# Altium PCB Anemometer.PcbDoc
Units mm, origin at the board's own origin, x right, y up, seen from the top; angles counter-clockwise.
Board outline 100 x 100 mm, 2 copper layers (Top Layer, Bottom Layer); 27 components, 35 nets, 139 pads, 7 vias.
Unrouted connection lines stored in the file: 51.
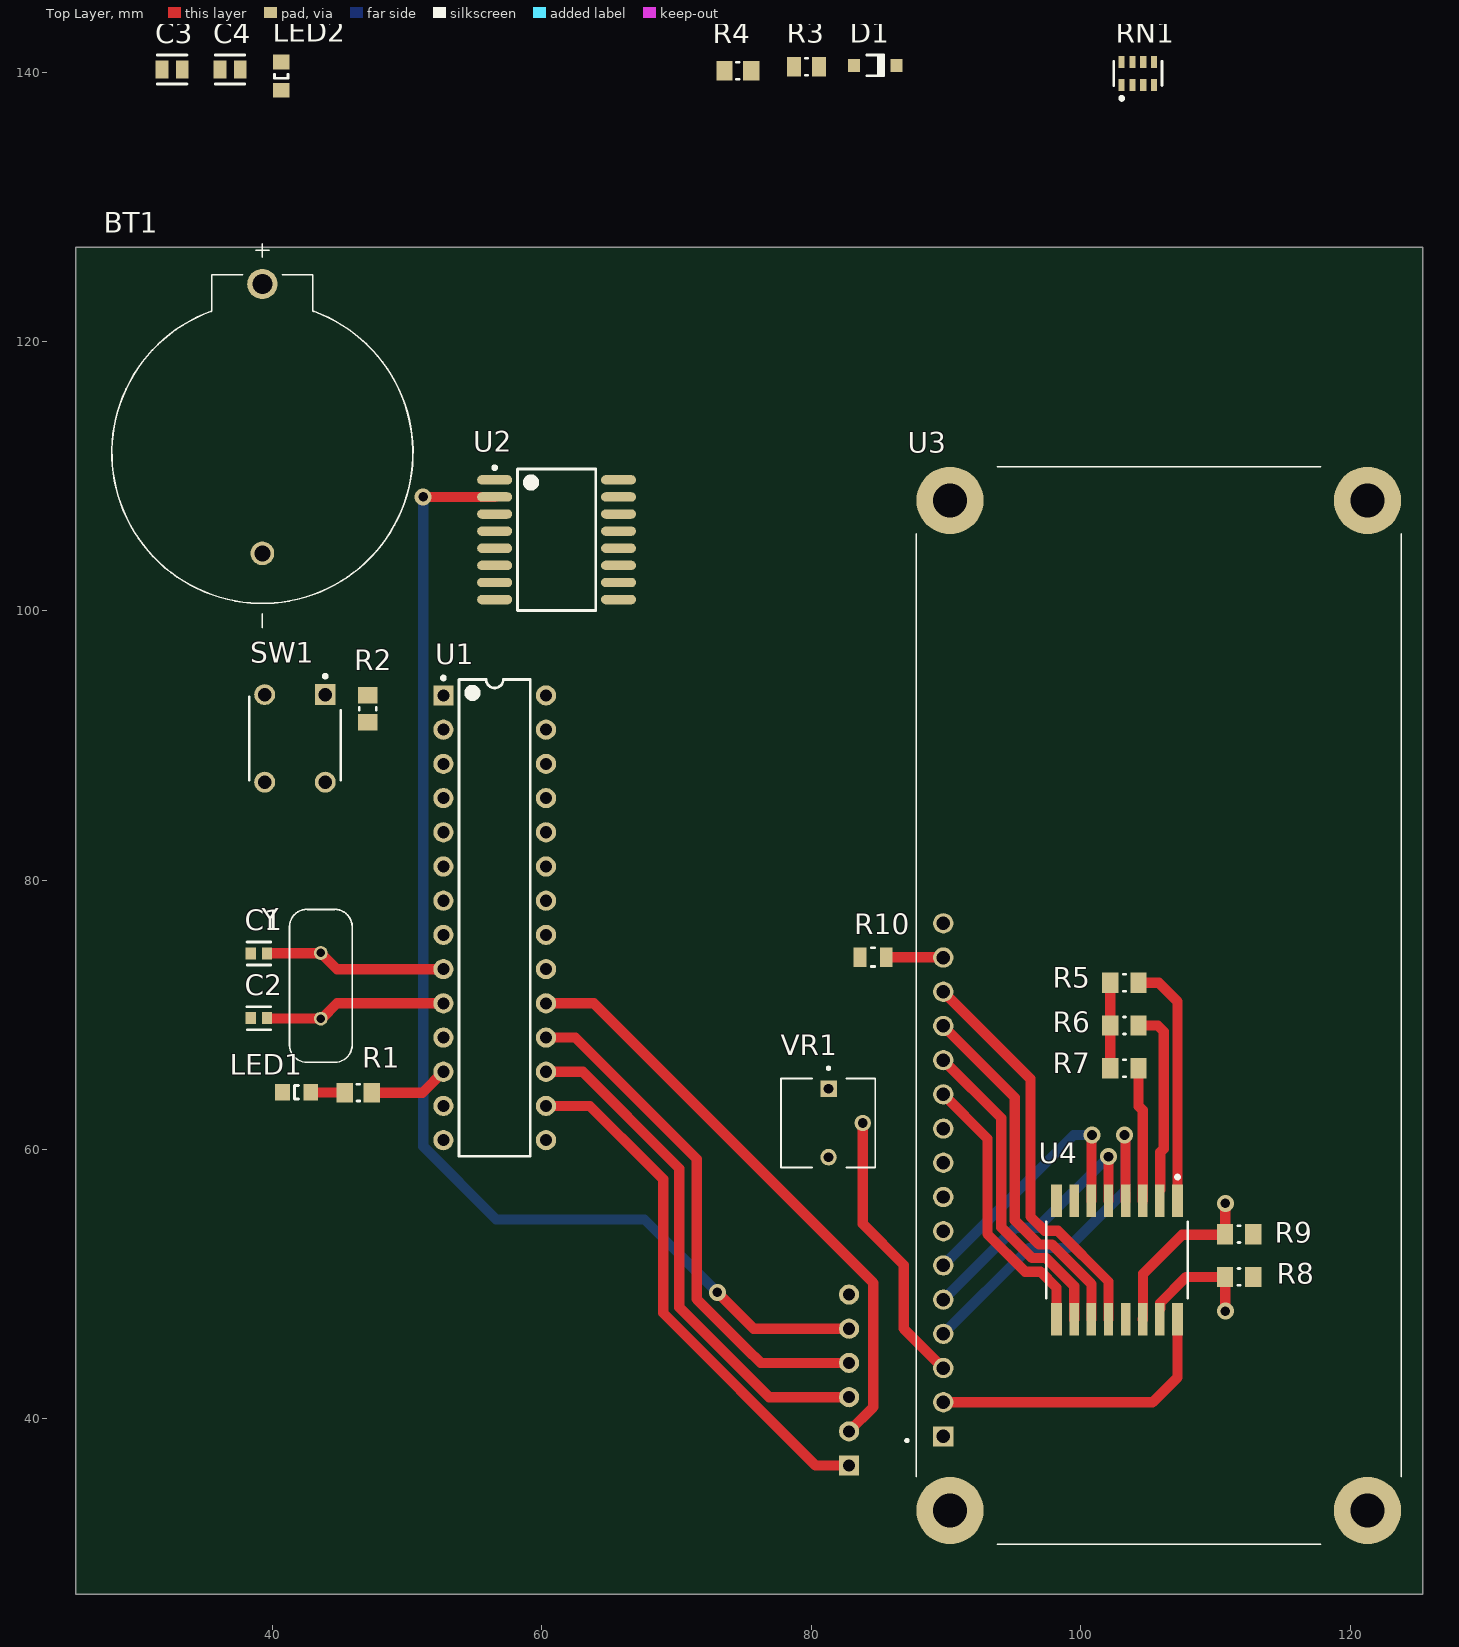
[diagram p0: Top Layer view]
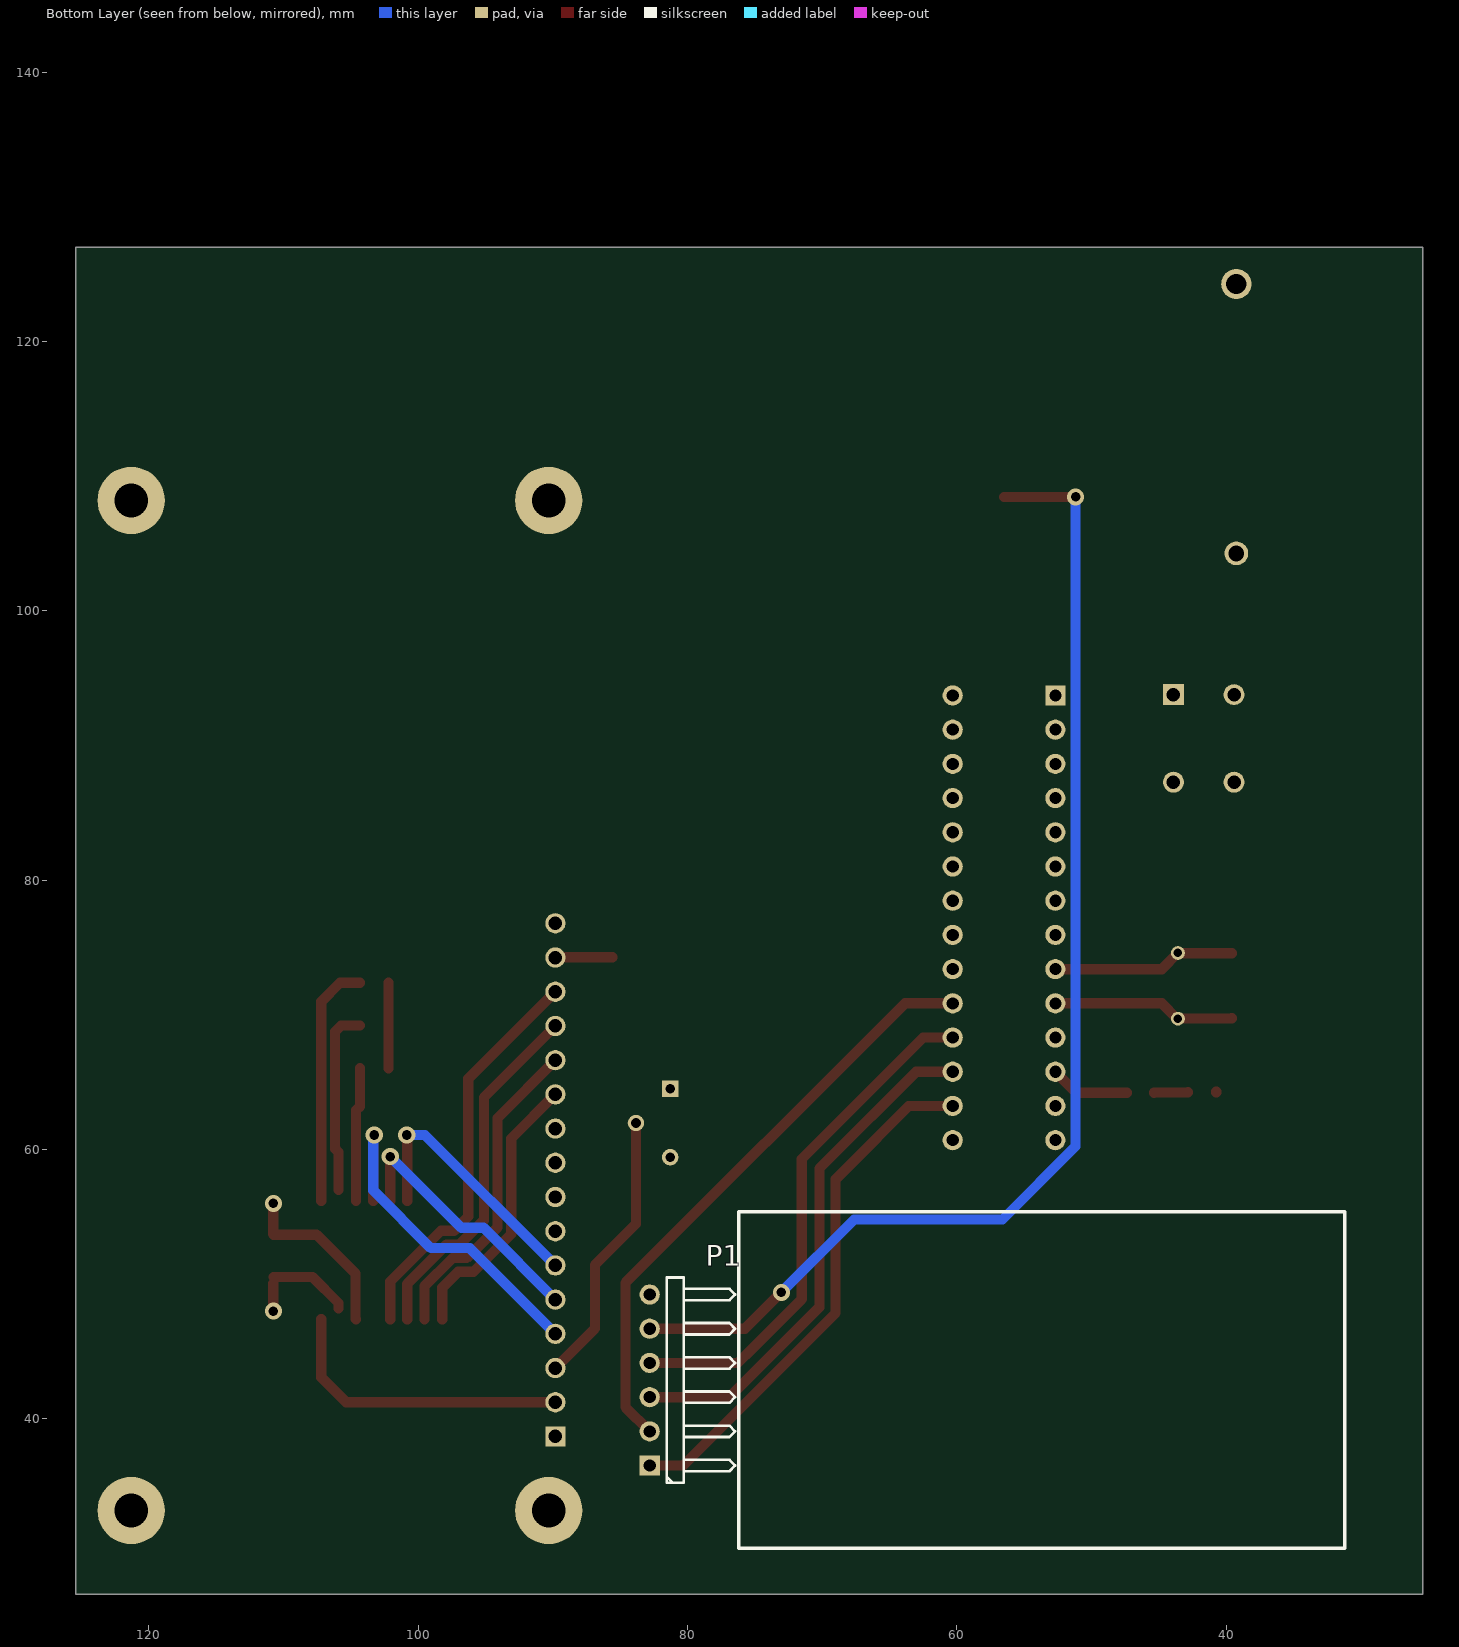
[diagram p1: Bottom Layer view, seen from below]

## Layer stack, top to bottom
Top Solder: solder mask 0.0102, Solder Resist, Dk 3.5
Top Layer: signal copper 0.0356
Dielectric 1: dielectric 0.32, FR-4, Dk 4.8
Bottom Layer: signal copper 0.0356
Bottom Solder: solder mask 0.0102, Solder Resist, Dk 3.5

## Board outline
25.4,27 125.4,27 125.4,127 25.4,127

## Design rules (kind name [scope] priority, off if disabled: settings)
Clearance [All] p1: gap=0.254 ignorepadtopadclearanceinfootprint=FALSE except(0: Arc-Hole Track-Hole SMDPad-Hole THPad-Hole Via-Hole Fill-Hole Poly-Hole Region-Hole Text-Hole)
ComponentClearance Under_LCD [InComponent('U3') vs InComponent('U4','R7','R5','R6','R8','R9')] p1: gap=0 collisioncheckmode=3 verticalgap=0 showdistances=FALSE
ComponentClearance ComponentClearance_1 [All] p2: gap=0.254 collisioncheckmode=3 verticalgap=0.254 showdistances=FALSE
MatchedLengths SPI_BUS [InNetClass('SPI_BUS')] p1: tolerance=0.254 checknetsindiffpair=FALSE checkdiffpairvsdiffpair=TRUE checkxsignals=TRUE checkothers=TRUE
PolygonConnect [All] p1: connectstyle=Relief reliefconductorwidth=0.254 reliefentries=4 polygonreliefangle="90 Angle" airgapwidth=0.254
RoomDefinition SD_Storage_ct [InComponentClass('SD_Storage_ct')] p1: confinementstyle=ConfineIn formatcopy=TRUE lockcomponents=FALSE outline 30,29.7 84.3,29.7 84.3,56.4 30,56.4
RoomDefinition Processing [InComponentClass('Processing')] p2: confinementstyle=ConfineIn formatcopy=TRUE lockcomponents=FALSE outline 27.49,58.85 64.69,58.85 64.69,97.65 27.49,97.65
RoomDefinition RTC [InComponentClass('RTC')] p3: confinementstyle=ConfineIn formatcopy=TRUE lockcomponents=FALSE outline 31.2,115.045 106.9,115.045 106.9,146.545 31.2,146.545
RoomDefinition LCD [InComponentClass('LCD')] p4: confinementstyle=ConfineIn formatcopy=TRUE lockcomponents=FALSE outline 86.233,27.82 126.746,27.82 126.746,111.32 86.233,111.32
RoutingVias [All] p1: holewidth=0.711 width=1.27 viastyle="Through Hole" minholewidth=0.711 minwidth=1.27 maxholewidth=0.711 maxwidth=1.27
SolderMaskExpansion [All] p1: expansion=0.102 istentingtop=FALSE
Width [All] p1: maxlimit=0.762 minlimit=0.254 preferedwidth=0.508 minimp=50.000000 maximp=50.000000 favimp=50.000000
29 further rules are at their usual default settings.

## Classes and differential pairs
net class SPI_BUS: MISO MOSI SDCS SDSCK
component class SD_Storage_ct: P1
component class RTC: BT1 C3 C4 D1 LED2 R3 R4 RN1 U2
component class Processing: C1 C2 LED1 R1 R2 SW1 U1 Y
component class LCD: R5 R6 R7 R8 R9 R10 U3 U4 VR1

## Components (designator, comment, footprint, x,y, rotation, side; value= is the part's Value field where it differs from the comment)
BT1 "BS-7" BAT_BS-7 39.243,114.267 r90 top
C1 "C0603C200J5GACTU" FP-C0603C-CF-MFG 38.98,74.56 r0 top value="20 pF"
C2 "C0603C200J5GACTU" FP-C0603C-CF-MFG 38.98,69.76 r0 top value="20 pF"
C3 "C0805C104K5RACTU" FP-C0805C-DN-MFG 32.545,140.201 r0 top value="0.10 μF"
C4 "C0805C104K5RACTU" FP-C0805C-DN-MFG 36.845,140.201 r0 top value="0.10 μF"
D1 "1N4148W-7-F" DIOD-SOD123-2_V 84.745,140.501 r0 top
LED1 "150080GS75000" 0805_A 41.78,64.26 r0 top
LED2 "150080GS75000" 0805_A 40.645,139.701 r90 top
P1 "Header 6H" HDR1X6H 82.8,36.54 r90 bottom
R1 "RC0805FR-071KL" RESC2013X60X35ML10T20 46.362,64.23 r180 top
R2 "RC0805FR-071KL" RESC2013X60X35ML10T20 47.062,92.73 r90 top
R3 "CRCW0805200RFKEA" RESC2013X50X30NL20T20 79.645,140.401 r0 top
R4 "RC0805FR-071KL" RESC2013X60X35ML10T20 74.545,140.101 r0 top
R5 "CRCW080510K0FKEA" FP-CRCW0805-e3-IPC_A 103.251,72.39 r0 top
R6 "CRCW080510K0FKEA" FP-CRCW0805-e3-IPC_A 103.251,69.215 r0 top
R7 "CRCW080510K0FKEA" FP-CRCW0805-e3-IPC_A 103.251,66.04 r0 top
R8 "CRCW080510K0FKEA" FP-CRCW0805-e3-IPC_A 111.76,50.546 r180 top
R9 "CRCW080510K0FKEA" FP-CRCW0805-e3-IPC_A 111.76,53.721 r180 top
R10 "CRCW0805330RFKEA" FP-CRCW0805-e3-MFG 84.582,74.295 r0 top
RN1 "742C083472JP" FP-742C083-MFG 104.245,139.901 r0 top
SW1 "B3W-1000" FP-B3W-1000-MFG 41.662,90.53 r90 top
U1 "ATmega328-PU" 28P3 56.49,77.21 r0 top
U2 "DS3231SN#" W16#H2_M 61.087,105.283 r0 top
U3 "LCD2X16" LCD_LCD2X16 105.8,70.7 r90 top
U4 "PCF8574T/3,518" FP-SOT162-1-MFG 102.7,51.8 r270 top
VR1 "3362P-103" TRIM_3362P-103 81.28,61.976 r270 top
Y "ECS-80-18-4XDN" XTAL_ECS-80-18-4XDN 43.58,72.16 r90 top

## Footprints (in the part's own frame and the unit in brackets; to place one, negate y for a bottom-side part, rotate by r counter-clockwise, add the part's x,y. Pads: shape width x height; smd on the part's side, far side on the other; paste and mask are expansions set on the pad)
28P3 [mm] "28-Pin Plastic Dual In-Line Package (PDIP)"
  rect 1.5x1.5 hole 0.9: 1(-3.81,16.51)
  round 1.5 hole 0.9: 2(-3.81,13.97) 3(-3.81,11.43) 4(-3.81,8.89) 5(-3.81,6.35) 6(-3.81,3.81) 7(-3.81,1.27) 8(-3.81,-1.27) 9(-3.81,-3.81) 10(-3.81,-6.35) 11(-3.81,-8.89) 12(-3.81,-11.43) 13(-3.81,-13.97) 14(-3.81,-16.51) 15(3.81,-16.51) 16(3.81,-13.97) 17(3.81,-11.43) 18(3.81,-8.89) 19(3.81,-6.35) 20(3.81,-3.81) 21(3.81,-1.27) 22(3.81,1.27) 23(3.81,3.81) 24(3.81,6.35) 25(3.81,8.89) 26(3.81,11.43) 27(3.81,13.97) 28(3.81,16.51)
  silkscreen extent -3.93,-17.7 2.65,17.93, body extent -3.6,-17.65 3.6,17.65, height 4.58
0805_A [mm] "Chip LED, 2-Leads, Body 2.0x1.3mm, IPC Medium Density"
  rect 1.1x1.2 smd: 1(-1.05,0) 2(1.05,0)
  silkscreen extent -0.15,-0.5 0.15,0.5, body extent -1,-0.62 1,0.63, height 0.68
BAT_BS-7 [mm]
  round 1.755 hole 1.17: NEG(-10,0)
  round 2.25 hole 1.5: POS(10,0)
  silkscreen extent -15.5,-11.18 13,11.18
DIOD-SOD123-2_V [mm] "SOD123, 2-Leads, Body 2.7x1.55mm, Height 1.45mm"
  rect 0.9x0.95 smd: 1(-1.575,0) 2(1.575,0)
  silkscreen extent -0.64,-0.82 0.64,0.77, body extent -1.35,-0.77 1.35,0.77, height 1.45
FP-742C083-MFG [mm]
  rect 0.45x0.9 smd paste+0 mask+0: 1(-1.2,-0.85) 2(-0.4,-0.85) 3(0.4,-0.85) 4(1.2,-0.85) 5(1.2,0.85) 6(0.4,0.85) 7(-0.4,0.85) 8(-1.2,0.85)
  silkscreen extent -1.8,-1.97 1.8,0.9, body extent -1.8,-1.4 1.8,1.4, height 0.25
FP-B3W-1000-MFG [mm]
  rect 1.55x1.55 hole 1 paste-1000 mask+0: 1(3.25,-2.25)
  round 1.55 hole 1 paste-1000 mask+0: 2(-3.25,-2.25) 3(3.25,2.25) 4(-3.25,2.25)
  silkscreen extent -3.1,-3.4 4.75,3.4, body extent -4.13,-3.5 4.13,3.5, height 0.25
FP-C0603C-CF-MFG [mm]
  rect 0.75x0.9 smd paste+0 mask+0: 1(-0.6,0) 2(0.6,0)
  silkscreen extent -0.87,-0.85 0.88,0.85, body extent -1.2,-0.6 1.2,0.6, height 0.25
FP-C0805C-DN-MFG [mm]
  rect 0.95x1.35 smd paste+0 mask+0: 1(-0.75,0) 2(0.75,0)
  silkscreen extent -1.1,-1.07 1.1,1.07, body extent -1.4,-0.85 1.4,0.85, height 0.25
FP-CRCW0805-e3-IPC_A [mil]
  rect 47.5x59.38 smd paste+0 mask+0: 1(-41.37,0) 2(41.37,0)
  silkscreen extent -3,-25 3,25, body extent -85,-49 85,49, height 10
FP-CRCW0805-e3-MFG [mm]
  rect 0.95x1.45 smd paste+0 mask+0: 1(-0.975,0) 2(0.975,0)
  silkscreen extent -0.13,-0.7 0.13,0.7, body extent -1.55,-0.82 1.55,0.82, height 0.25
FP-SOT162-1-MFG [mm]
  rect 2.4x0.8 smd paste+0 mask+0: 1(-4.4,4.495) 8(-4.4,-4.495) 9(4.4,-4.495) 16(4.4,4.495)
  rect 2.4x0.7 smd paste+0 mask+0: 2(-4.4,3.175) 3(-4.4,1.905) 4(-4.4,0.635) 5(-4.4,-0.635) 6(-4.4,-1.905) 7(-4.4,-3.175) 10(4.4,-3.175) 11(4.4,-1.905) 12(4.4,-0.635) 13(4.4,0.635) 14(4.4,1.905) 15(4.4,3.175)
  silkscreen extent -6.29,-5.25 2.83,5.25, body extent -5.72,-5.95 5.72,5.95, height 0.25
HDR1X6H [mm] "Connector; Header; 6 Position; Right Angle"
  rect 1.5x1.5 hole 0.9: 1(0,0)
  round 1.5 hole 0.9: 2(2.54,0) 3(5.08,0) 4(7.62,0) 5(10.16,0) 6(12.7,0)
  silkscreen extent -1.27,-6.35 13.97,-1.27
LCD_LCD2X16 [mm]
  rect 1.508x1.508 hole 1: 1(-32,16)
  round 1.508 hole 1: 2(-29.46,16) 3(-26.92,16) 4(-24.38,16) 5(-21.84,16) 6(-19.3,16) 7(-16.76,16) 8(-14.22,16) 9(-11.68,16) 10(-9.14,16) 11(-6.6,16) 12(-4.06,16) 13(-1.52,16) 14(1.02,16) 15(3.56,16) 16(6.1,16)
  round 5 hole 2.5: S1(-37.5,15.5) S2(37.5,15.5) S3(37.5,-15.5) S4(-37.5,-15.5)
  silkscreen extent -40,-18 40,18.8
RESC2013X50X30NL20T20 [mm] "Chip Resistor, 2-Leads, Body 2.00x1.25mm, IPC Medium Density"
  rect 1.05x1.45 smd: 1(-0.925,0) 2(0.925,0)
  silkscreen extent -0.1,-0.63 0.1,0.63, body extent -1.1,-0.72 1.1,0.72, height 0.5
RESC2013X60X35ML10T20 [mm] "Chip Resistor, 2-Leads, Body 2.1x1.35mm, IPC Low Density"
  rect 1.2x1.45 smd: 1(-1,0) 2(1,0)
  silkscreen extent -0.1,-0.63 0.1,0.63, body extent -1.05,-0.68 1.05,0.67, height 0.6
TRIM_3362P-103 [mm]
  rect 1.222x1.222 hole 0.714: 1(-2.54,0)
  round 1.222 hole 0.714: 2(0,2.54) 3(2.54,0)
  silkscreen extent -4.16,-3.53 3.3,3.47
W16#H2_M [mm] "SOIC, 16-Leads, Body 10.3x7.5mm, Pitch 1.27mm, IPC Low Density"
  oval 2.6x0.7 smd: 1(-4.6,4.445) 2(-4.6,3.175) 3(-4.6,1.905) 4(-4.6,0.635) 5(-4.6,-0.635) 6(-4.6,-1.905) 7(-4.6,-3.175) 8(-4.6,-4.445) 9(4.6,-4.445) 10(4.6,-3.175) 11(4.6,-1.905) 12(4.6,-0.635) 13(4.6,0.635) 14(4.6,1.905) 15(4.6,3.175) 16(4.6,4.445)
  silkscreen extent -4.72,-5.25 2.9,5.47, body extent -3.8,-5.25 3.8,5.25, height 2.65
XTAL_ECS-80-18-4XDN [mm]
  round 1.03 hole 0.63: 1(-2.44,0) 2(2.44,0)
  silkscreen extent -5.68,-2.33 5.68,2.33

## Part data
BT1: "BATTERY HOLDER COIN 20MM PC PIN", Package=None, Availability=Unavailable, MF="MPD _Memory", MP=BS-7, Price=None, SnapEDA_Link=https://www.snapeda.com/parts/BS-7/MPD%20%28Memory%20Protection%20Devices%29/view-part/4219629/?ref=snap
C1 C2: library part CMP-1035-00783-3, "CAP CER 20PF 50V 5% NP0 0603", Capacitance="20 pF", Manufacturer=KEMET, Package=C0603C-CF, Temperature="-55°C to +125°C", Temperature Characteristic=C0G, Temperature Coefficient=30ppm/°C, Temperature Range High=+125°C, Temperature Range Low=-55°C, Tolerance=0.05, Voltage Rating="50 V", Automotive=Yes, Automotive Grade="Grade 1", Category=Cap, ComponentLink2Description=Datasheet, ComponentLink2URL=https://api.kemet.com/component-edge/download/datasheet/C0603C100J5GACAUTO.pdf, Device Class L1="Passive Components", Device Class L2=Capacitors, Device Class L3="Ceramic Capacitors", Digikey Description="CAP CER 20PF 50V 5% NP0 0603", Height=0.87mm, Lead Free=Yes, Manufacturer Part Number=C0603C200J5GACTU, Material=Ceramic, Mouser Description="Multilayer Ceramic Capacitors MLCC - SMD/SMT 50volts 20pF C0G 5%", Octopart=https://octopart.com/c0603c200j5gactu-kemet-9138585, RoHS=TRUE
C3 C4: library part CMP-2007-00279-2, "CAP CER 0.1UF 50V X7R 0805", Capacitance="0.10 μF", Manufacturer=KEMET, Package=C0805C-DN, Temperature="-55°C to +125°C", Temperature Characteristic=X7R, Temperature Coefficient=30ppm/°C, Temperature Range High=+125°C, Temperature Range Low=-55°C, Tolerance=0.1, Voltage Rating="50 V", Automotive=No, Category=Cap, ComponentLink2Description=Datasheet, ComponentLink2URL=https://content.kemet.com/datasheets/KEM_C1003_C0G_SMD.pdf, Device Class L1="Passive Components", Device Class L2=Capacitors, Device Class L3="Ceramic Capacitors", Digikey Description="CAP CER 0.1UF 50V X7R 0805", Height=0.88mm, Ipc Land Pattern Name=CAPC200125X78, Lead Free=Yes, Manufacturer Part Number=C0805C104K5RACTU, Material=Ceramic, Mouser Description="Cap Ceramic 0.1uF 50V X7R 10% SMD 2.0 x 1.2 mm 125 C Paper T/R", Octopart=https://octopart.com/c0805c104k5ractu-kemet-143926, RoHS=TRUE
D1: library part CMP-2000-04932-2, "Fast Switching Diode, 100 V, 0.15 A, -65 to 150 degC, 2-Pin?SOD123, RoHS, Tape and Reel", If - Forward Current=0.15A, Ir - Reverse Current=1uA, Manufacturer=DiodesIncorporated, Max Surge Current=2A, Maximum Operating Temperature=+150C, Minimum Operating Temperature=-65C, Operating Temperature Range=-65Cto+150C, Package / Case=SOD-123, Package Reference=SOD123-2, Peak Reverse Voltage=100V, Vf - Forward Voltage=1.25V, Brand=DiodesIncorporated, Configuration=Single, Datasheet URL=http://www.farnell.com/datasheets/1915529.pdf, Datasheet Version="Rev. 24-2, 10/2013", Factory Pack Quantity=3000, Height=1.25mm, Length=2.85mm, Manufacturer URL=http://www.diodes.com/, Mounting Style=SMD/SMT, Package URL=http://www.diodes.com/datasheets/ds18004.pdf, Packaging=Reel, Product=SwitchingDiodes, Product Category=Diodes-GeneralPurpose,Power,Switching, Recovery Time=4ns, RoHS=True, Series=1N4148, Type=SwitchingDiode, Unit Weight=0.000353oz, Width=1.7mm
LED1 LED2: library part CMP-1426-00007-1, "SMD mono-color Chip LED, WL-SMCW, Green", Color=Green, Manufacturer="Wuerth Elektronik", ComponentLink1Description="Manufacturer URL", ComponentLink1URL=http://www.we-online.com, ComponentLink2Description=Datasheet, ComponentLink2URL=http://katalog.we-online.com/led/datasheet/150080GS75000.pdf, PackageReference=0805_A, PartNumber=150080GS75000
P1: "Header, 6-Pin, Right Angle", LatestRevisionDate=17-Jul-2002, LatestRevisionNote="Re-released for DXP Platform.", Publisher="Altium Limited"
R1 R2 R4: library part CMP-2100-03671-1, "Chip Resistor, 1 KOhm, +/- 1%, 125 mW, -55 to 155 degC, 0805 (2012 Metric), RoHS, Tape and Reel", Case Code (Imperial)=0805, Case Code (Metric)=2012, Manufacturer=Yageo, Max Operating Temperature=155degC, Max Power Dissipation=125mW, Min Operating Temperature=-55degC, Package Description="2-Pin Surface Mounted Device, Body 2 x 1.25 mm", Package Quantity=1, Resistance=1KOhm, Temperature Coefficient=100ppm/degreesC, Tolerance=1%, Voltage Rating=150V, Case/Package=0805, Composition=ThickFilm, Datasheet URL=http://www.yageo.com/NewPortal/yageodocoutput?fileName=/pdf/R-Chip/PYu-RC_Group_51_RoHS_L_5.pdf, Datasheet Version="Rev. 5, 10/2016", Depth=1.25mm, Height=0.024inch, Lead Free=LeadFree, Length=0.079inch, Manufacturer URL=http://www.yageo.com/, Military Standard=Not, Number of Pins=2, Number of Terminations=2, Package Reference=0805, Packaging=TapeandReel, Power Rating=125mW, REACH SVHC=Unknown, RoHSCompliant=true, Termination=SMD/SMT, Voltage Rating (DC)=150V, Width=0.049inch
R3: library part CMP-2001-03663-1, Manufacturer="Vishay Dale", Part Number=CRCW0805200RFKEA
R5 R6 R7 R8 R9: library part CMP-2001-04908-2, "RES Thick Film, 10kΩ, 1%, 0.125W, 100ppm/°C, 0805", Case Code (Imperial)=0805, Case Code (Metric)=2012, Max Operating Temperature=155°C, Min Operating Temperature=-55°C, Package Quantity=5000, Power Rating=125mW, Resistance=10kR, Temperature Coefficient=100ppm/°C, Tolerance=1%, Voltage Rating=150V, Case/Package=0805, Composition="Thick Film", Contact Plating=Tin, Depth=1.25mm, Height=0.45mm, Lead Free="Lead Free", Length=2mm, Military Standard=Not, Packaging="Tape and Reel", Radiation Hardening=No, Termination=SMD/SMT, Voltage Rating (DC)=150V, Weight=0.000194oz, Width=1.25mm
R10: library part CMP-2001-03823-2, "RES Thick Film, 330Ω, 1%, 0.125W, 100ppm/°C, 0805", Case Code (Imperial)=0805, Case Code (Metric)=2012, Max Operating Temperature=155°C, Max Power Dissipation=125mW, Min Operating Temperature=-55°C, Package Quantity=10, Resistance=330R, Temperature Coefficient=100ppm/°C, Tolerance=1%, Voltage Rating=150V, Case/Package=0805, Composition="Thick Film", Contact Plating=Tin, Depth=1.25mm, Features="Automotive AEC-Q200", Height=0.02inch, Lead Free="Lead Free", Length=2mm, Military Standard=Not, Mount="Surface Mount", Number of Terminations=2, Packaging="Tape and Reel", Power Rating=125mW, Termination=SMD/SMT, Voltage Rating (DC)=150V, Weight=0.000194oz, Width=0.049inch
RN1: library part CMP-06828-000002-1, "RES ARRAY 4 RES 4.7K OHM 1206", Case Code (Imperial)=1206, Case Code (Metric)=3216, Case/Package=Molded, Max Operating Temperature=125°C, Min Operating Temperature=-55°C, Number of Resistors=4, Package Quantity=1, Power Dissipation=63mW, Power Per Element=62.5mW, Power Rating=250mW, Resistance=4.7kR, Temperature Coefficient=200ppm/°C, Tolerance=5%, Working Voltage=50V, Circuit Type=Isolated, Contact Plating=Tin, Depth=1.6mm, Height=0.028inch, Lead Free="Lead Free", Length=3.2mm, Military Standard=Not, Mount="Surface Mount", Number of Elements=4, Number of Pins=8, Number of Terminals=8, Packaging="Tape and Reel", Radiation Hardening=No, Terminal Pitch=0.8mm, Termination=Concave, Width=0.063inch
SW1: library part CMP-08834-000045-1, "SWITCH TACTILE SPST-NO 0.05A 24V", Actuator Color=White, Contact Current Rating=50mA, Contact Resistance=100mR, Insulation Resistance=100MR, Max Operating Temperature=70°C, Max Voltage Rating (DC)=24V, Min Operating Temperature=-25°C, Operating Force=1.57N, Package Quantity=100, Ratings=IP67, Actuator Length=0.9mm, Actuator Type=Standard, Contact Material=Silver, Contact Plating=Silver, Current Rating=50mA, Depth=6.6mm, Illumination Type=Non-Illuminated, Length=6.6mm, Max Current Rating=50mA, Mechanical Life=1000000Cycles, Mount="Through Hole", Number of Poles=1, Orientation=Straight, Packaging=Bulk, Radiation Hardening=No, RoHS Compliant=Yes, Series=B3W, Switch Function=Off-Mom, Switch Travel=0.25mm, Termination="PC Pins", Throw Configuration=SPST, Voltage Rating (DC)=24V, Weight=0.3g
U1: library part CMP-0095-00015-2, "8-bit AVR Microcontroller, 32KB Flash, 1KB EEPROM, 2KB SRAM, 28-pin PDIP, Industrial Grade (-40°C to 85°C)", ComponentLink1Description="Manufacturer URL", ComponentLink1URL=http://www.atmel.com/, ComponentLink2Description="ATmega48A/48PA/88A/88PA/168A/168PA/328/328P Datasheet", ComponentLink2URL=http://www.atmel.com/dyn/resources/prod_documents/8271.pdf, ComponentLink3Description="ATmega48A/48PA/88A/88PA/168A/168PA/328/328P Summary", ComponentLink3URL=http://www.atmel.com/dyn/resources/prod_documents/8271S.pdf, DatasheetVersion="revD, May-2011", PackageDescription="28-lead (0.300\"/7.62mm Wide) Plastic Dual Inline Package (PDIP)", PackageReference=28P3, PackageVersion="revB, Sep-2001", RevisionNote="DatasheetVersion updated. URLs added."
U2: library part CMP-0254-00293-2, "Extremely Accurate I2C-Integrated Real-Time Clock/TCXO/Crystal, 16-Pin SO, -40 to 85 degC, RoHS Qualified", Code_IPC=SOIC127P1030-16, Code_JEDEC=MS-013-AA, ComponentLink1Description="Manufacturer URL", ComponentLink1URL=http://www.maxim-ic.com, ComponentLink2Description=Datasheet, ComponentLink2URL=http://datasheets.maxim-ic.com/en/ds/DS3231.pdf, ComponentLink3Description="Package Specification", ComponentLink3URL=http://pdfserv.maxim-ic.com/package_dwgs/21-0042.PDF, DatasheetVersion="Rev 8, Jul-2010", PackageDescription="16-Pin Small-Outline IC, Wide (0.3in), 1.27 mm Pitch, SOIC (W), RoHS Qualified", PackageReference=W16#H2, PackageVersion="revD, 2010"
U3: "Display; Display: LCD 2x16 characters (blue backlight)", Package=None, Availability=Unavailable, MF=mikroElektronika, MP=LCD2X16, Price=None, SnapEDA_Link=https://www.snapeda.com/parts/LCD2X16/mikroElektronika/view-part/2472530/?ref=snap
U4: library part CMP-10112-000010-1, "IC I/O EXPANDER I2C 8B 16SOIC", Ambient Temperature Range High=+85°C, Ambient Temperature Range Low=-40°C, Frequency=100kHz, Manufacturer="NXP Semiconductors", Max Junction Temp=+125°C, Max Supply Voltage=6V, Min Supply Voltage=2.5V, Nominal Supply Current=40uA, Package=SOT162-1, Temperature="-40°C to +85°C", Automotive=No, Category=IC, ComponentLink2Description=Datasheet, ComponentLink2URL=https://www.nxp.com/docs/en/data-sheet/PCF8574_PCF8574A.pdf, Device Class L1="Integrated Circuits (ICs)", Device Class L2="Interface ICs", Device Class L3="I/O Expanders", Digikey Description="IC I/O EXPANDER I2C 8B 16SOIC", Footprint Url=https://www.nxp.com/docs/en/package-information/SOT162-1.pdf, Height=2.65mm, Interface=I2C, Ipc Land Pattern Name=SOIC127P1032X265-16, Lead Free=Yes, Manufacturer Part Number=PCF8574T/3,518, Mouser Description="PCF8574 Series 2.5 - 6V Remote 8-bit I/O Expander for I2C-bus - SOIC-16", Number Of I/Os=8, Octopart=https://octopart.com/pcf8574t%2F3%2C518-nxp+semiconductors-10470852, RoHS=TRUE, Standoff Height=0.1mm, Temperature Range High=+85°C, Temperature Range Low=-40°C
VR1: "Res Cermet Trimmer 50K Ohm 10% 1/2W 1(Elec)/1(Mech)Turn 2.77mm (6.6 X 6.99 X 4.7mm) Pin Thru-Hole Tube", Package=None, Availability=Unavailable, MP=3362P-103, Price=None
Y: "8MHz Â±30ppm Crystal 18pF 80 Ohms HC-49/US", Package="HC-49/US ECS International", Digi-Key_Part_Number=X1115-ND, Digi-Key_Purchase_URL=https://www.digikey.in/product-detail/en/ecs-inc/ECS-80-18-4XDN/X1115-ND/827606?utm_source=snapeda&utm_medium=aggregator&utm_campaign=symbol, MF="ECS Inc.", MP=ECS-80-18-4XDN, SnapEDA_Link=https://www.snapeda.com/parts/ECS-80-18-4XDN/ECS%20Inc./view-part/49558/?ref=snap

## Via types
v1: diameter 1.27, hole 0.711, Top Layer to Bottom Layer, 7 vias

## Nets (pads, with @x,y where several pads share a name; then routed paths per layer and width w, separated by ;. In a path a pad name is that pad's centre, name@x,y a point inside that pad or via, vN(x,y) a via of type N, cw(c..) or ccw(c..) an arc to the next point about the centre after c; other vN are vias at no path point)
3V3: C3.1 C4.1 P1.5 R3.2 R4.2 RN1.1 RN1.2 RN1.3 RN1.4 U2.2 | length 90.8
  Top Layer w0.762: v1(51.181,108.458) U2.2 ; v1(73.025,49.403) 75.728,46.7 P1.5
  Bottom Layer w0.762: v1(51.181,108.458) 51.181,60.24 56.608,54.813 67.615,54.813 v1(73.025,49.403)
5V: R2.1 R5.1 R6.1 R7.1 R8.1 R9.1 R10.1 U1.7 U3.2 U4.16 VR1.1 | length 28.8
  Top Layer w0.762: U3.2 105.34,41.24 107.195,43.095 U4.16 ; R7.1 R6.1 R5.1
32k: RN1.8 U2.1
!INT: U4.13
A0: R5.2 U4.1 | length 18.3
  Top Layer w0.762: R5.2 105.791,72.39 107.195,70.986 U4.1
A1: R6.2 U4.2 | length 13.9
  Top Layer w0.762: R6.2 105.714,69.215 106.16,68.769 106.16,60.071 105.906,59.817 U4.2@105.906,57.019
A2: R7.2 U4.3 | length 10
  Top Layer w0.762: R7.2 104.302,63.223 104.605,62.92 U4.3
GND: BT1.NEG C1.1 C2.1 C3.2 C4.2 LED1.1 LED2.1 P1.6 SW1.3 SW1.4 U1.8 U1.22 U2.13 U3.1 U3.7 U3.8 U3.9 U3.10 U3.16 U4.8 VR1.3 | length 0
  Top Layer w0.762: LED1.1 LED1.1@40.73,64.31
MISO: P1.4 U1.18 | length 38.6
  Top Layer w0.762: U1.18 62.48,68.32 71.501,59.299 71.501,48.899 75.173,45.227 76.24,44.16 P1.4
MOSI: P1.3 U1.17 | length 38.5
  Top Layer w0.762: U1.17 63.02,65.78 69.793,59.007 70.2,58.6 70.2,48.3 76.88,41.62 P1.3
NetD1_1: D1.1 R3.1
NetLED1_2: LED1.2 R1.2 | length 2.5
  Top Layer w0.762: LED1.2 42.845,64.245 45.348,64.245 R1.2
NetLED2_2: LED2.2 R4.1
NetR10_2: R10.2 U3.15 | length 4.3
  Top Layer w0.762: R10.2 85.574,74.278 89.782,74.278 U3.15
OSCIN: C1.2 U1.9 Y.2 | length 13.6
  Top Layer w0.762: C1.2 39.58,74.574 39.586,74.58 43.56,74.58 Y.2 44.78,73.4 U1.9
OSCOUT: C2.2 U1.10 Y.1 | length 13.6
  Top Layer w0.762: C2.2 39.58,69.746 39.586,69.74 43.56,69.74 Y.1 43.645,69.72 44.785,70.86 U1.10
P0: U3.4 U4.4 | length 26.9
  Top Layer w0.762: v1(103.251,61.087) 103.335,61.003 103.335,58.971 ; U4.4 103.335,58.835
  Bottom Layer w0.762: U3.4 96.166,52.686 99.041,52.686 103.335,56.98 103.335,61.003 v1(103.251,61.087)
P1: U3.5 U4.5 | length 19.9
  Top Layer w0.762: U4.5 v1(102.065,59.479)
  Bottom Layer w0.762: U3.5 95.132,54.192 96.778,54.192 v1(102.065,59.479)
P2: U3.6 U4.6 | length 20
  Top Layer w0.762: U4.6 100.795,61.044 v1(100.838,61.087)
  Bottom Layer w0.762: U3.6 99.487,61.087 v1(100.838,61.087)
P4: U3.11 U4.9 | length 20.8
  Top Layer w0.762: U3.11 93.077,60.823 93.077,53.735 95.885,50.927 97.021,50.927 98.205,49.743 U4.9
P5: U3.12 U4.10 | length 23.9
  Top Layer w0.762: U3.12 94.093,62.347 94.093,54.243 96.393,51.943 97.442,51.943 99.525,49.86 U4.10
P6: U3.13 U4.11 | length 26.9
  Top Layer w0.762: U3.13 95.109,63.871 95.109,54.751 96.901,52.959 97.863,52.959 100.795,50.027 U4.11
P7: U3.14 U4.12 | length 30
  Top Layer w0.762: U3.14 96.266,65.254 96.266,55.031 97.322,53.975 98.298,53.975 102.065,50.208 U4.12
rcint: RN1.7 U1.4 U2.3
RESET: R2.2 SW1.1 SW1.2 U1.1
RTC_BAT+: BT1.POS D1.2 U2.14
sa: U1.14
SCL: R9.2 RN1.6 U1.28 U2.16 U4.14 | length 12.9
  Top Layer w0.762: U4.14 104.636,47.431 104.636,50.788 107.534,53.686 R9.2@110.709,53.686 ; R9.2@110.744,53.756 v1(110.744,56.007)
scsp: R1.1 U1.12 | length 6
  Top Layer w0.762: R1.1 51.13,64.23 U1.12
SDA: R8.2 RN1.5 U1.27 U2.15 U4.15 | length 8
  Top Layer w0.762: U4.15@105.906,48.219 105.906,48.609 107.843,50.546 R8.2 ; v1(110.744,48.006) R8.2@110.744,50.038
SDCS: P1.1 U1.16 | length 39.4
  Top Layer w0.762: U1.16 63.56,63.24 68.144,58.656 69,57.8 69,47.867 80.327,36.54 P1.1
SDSCK: P1.2 U1.19 | length 44.7
  Top Layer w0.762: U1.19 63.84,70.86 84.6,50.1 84.6,40.88 P1.2
sest: U1.11
ss: U1.13
VO: U3.3 VR1.2 | length 20.7
  Top Layer w0.762: VR1.2 83.82,54.483 86.868,51.435 86.868,46.712 U3.3
pads on no net: U1.2 U1.3 U1.5 U1.6 U1.15 U1.20 U1.21 U1.23 U1.24 U1.25 U1.26 U2.4 U2.5 U2.6 U2.7 U2.8 U2.9 U2.10 U2.11 U2.12 U3.S1 U3.S2 U3.S3 U3.S4 U4.7

## Silkscreen, mask and mechanical layers (free items; w line width, h text height)
Bottom Overlay:
  lines w0.254: 31.2,30.4 31.2,55.4 76.2,55.4 76.2,30.4 31.2,30.4
Mechanical 1:
  the board outline again, w0.254